# Altium PCB PCB1.PcbDoc
Units mm, origin at the board's own origin, x right, y up, seen from the top; angles counter-clockwise.
Board outline 74 x 32 mm, 2 copper layers (Top Layer, Bottom Layer); 32 components, 17 nets, 73 pads, 0 vias.
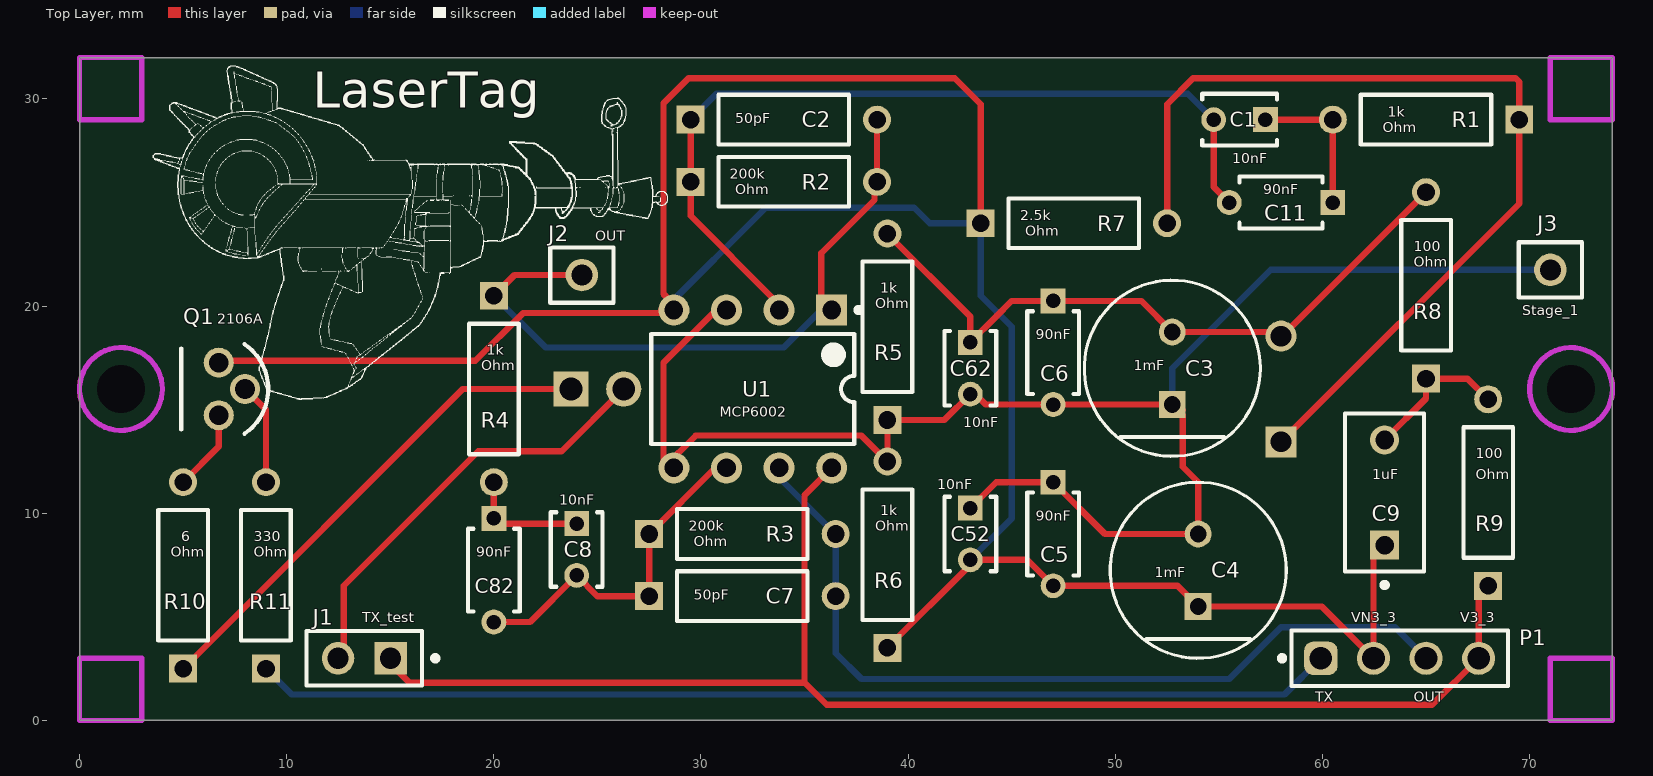
[diagram p0: Top Layer view]
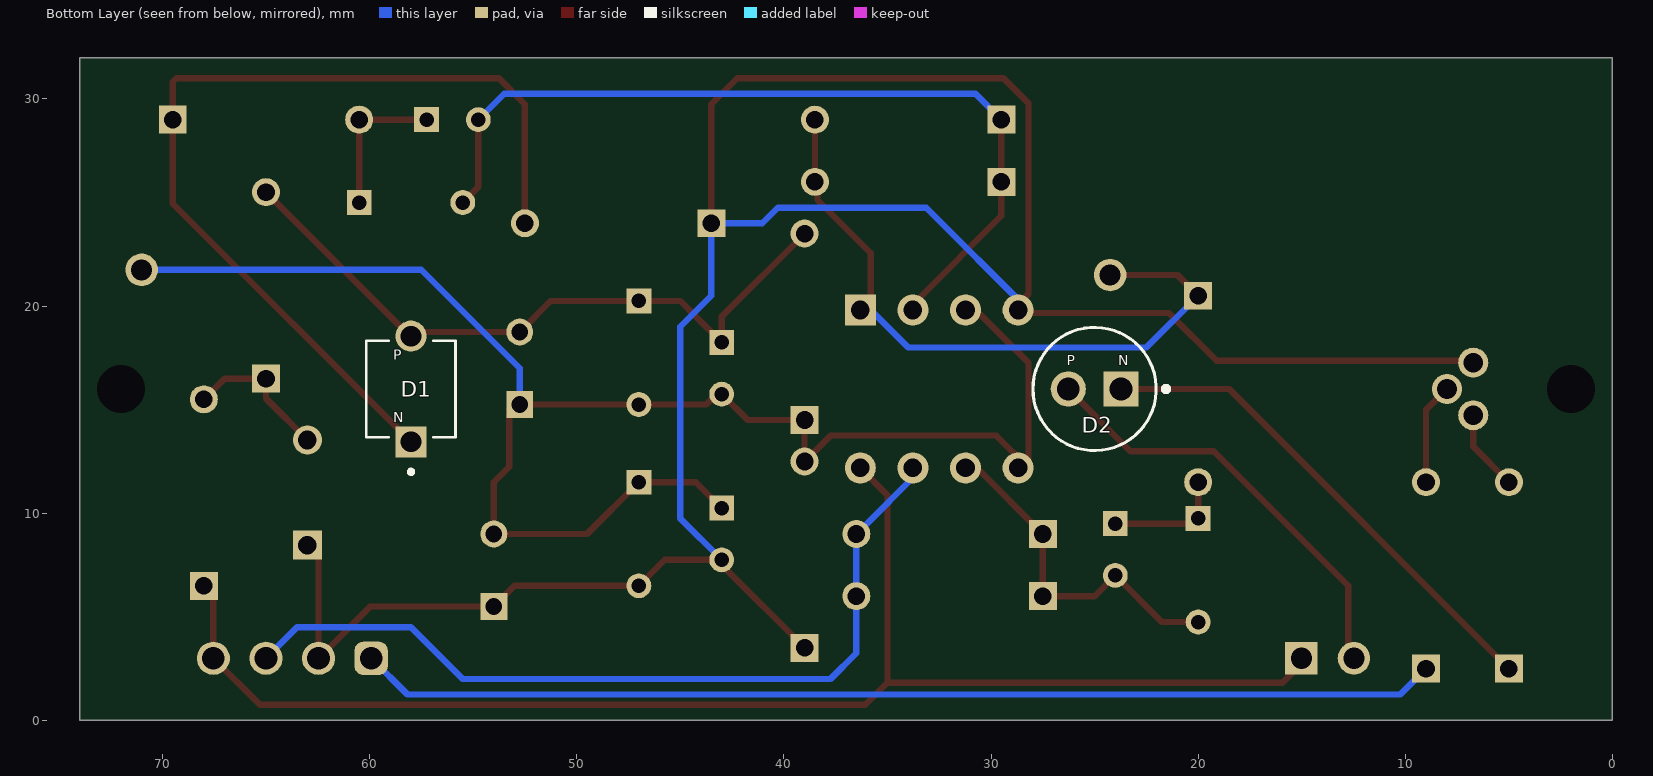
[diagram p1: Bottom Layer view, seen from below]

## Layer stack, top to bottom
Top Solder: solder mask 0.0102, Solder Resist, Dk 3.5
Top Layer: signal copper 0.0356
Dielectric 1: dielectric 0.32, FR-4, Dk 4.8
Bottom Layer: signal copper 0.0356
Bottom Solder: solder mask 0.0102, Solder Resist, Dk 3.5

## Board outline
0,0 74,0 74,32 0,32

## Design rules (kind name [scope] priority, off if disabled: settings)
AcuteAngle [All] p1: minimum=3.00000000000000E+0001 checktracksonly=FALSE
Clearance [All] p1: gap=0.305 ignorepadtopadclearanceinfootprint=TRUE except(0: Arc-Hole Track-Hole SMDPad-Hole THPad-Hole Via-Hole Fill-Hole Poly-Hole Region-Hole; 0.152: SMDPad-SMDPad SMDPad-THPad SMDPad-Via; 0.254: Arc-Text Track-Text SMDPad-Text THPad-Text Via-Via Via-Text Fill-Text Poly-Text Region-Text Text-Text; 0.381: Arc-Arc Arc-Track Arc-SMDPad Arc-THPad Arc-Via Track-Track Track-SMDPad Track-THPad Track-Via THPad-THPad THPad-Via)
ComponentClearance [All] p1: gap=0.508 collisioncheckmode=3 verticalgap=0.508 showdistances=TRUE
DiffPairsRouting [All] p1: maxlimit=1.27 minlimit=0.305 mostfreqgap=0.305 toplayer_minwidth=0.305 toplayer_maxwidth=0.66 toplayer_prefwidth=0.508 bottomlayer_minwidth=0.305 bottomlayer_maxwidth=0.66 bottomlayer_prefwidth=0.508 maxuncoupledlength=0.508
Height [All] p1: minheight=0 maxheight=25.4 prefheight=25.4
HoleSize [All] p1: absolutevalues=TRUE maxlimit=3.25 minlimit=0.3 maxpercent=80.000 minpercent=20.000
HoleToHoleClearance [All] p1: gap=0.508 allowstackedmicrovias=TRUE
LayerPairs [All] p1: enforce=FALSE
MinimumAnnularRing [All] p1: minimumring=0.203
MinimumSolderMaskSliver [All] p1: minsoldermaskwidth=0
PermittedLayers [All] p1: toplayerpermitted=TRUE bottomlayerpermitted=TRUE
PlaneConnect [All] p1: planeconnectstyle=Relief reliefexpansion=0.508 reliefentries=4 reliefconductorwidth=0.508 reliefairgap=0.254
PolygonConnect [All] p1: thpad.connectstyle=Relief thpad.reliefconductorwidth=0.508 thpad.reliefentries=4 thpad.polygonreliefangle="45 Angle" thpad.airgapwidth=0.381 smdpad.connectstyle=Relief smdpad.reliefconductorwidth=0.254 smdpad.reliefentries=4 smdpad.polygonreliefangle="90 Angle" smdpad.airgapwidth=0.254 smdpad.conductorbypadedge=TRUE smdpad.mindistance=0.381 smdpad.enablemindistance=FALSE via.connectstyle=Relief via.reliefconductorwidth=0.508 via.reliefentries=4 via.polygonreliefangle="90 Angle" via.airgapwidth=0.254
RoutingCorners [All] p1: cornerstyle=45-Degree minsetback=0.508 maxsetback=2.54
RoutingVias [All] p1: holewidth=0.8 width=1.27 viastyle="Through Hole" minholewidth=0.6 minwidth=1.108 maxholewidth=1 maxwidth=2.032
SMDEntry [All] p1: side=TRUE corner=TRUE anyangle=TRUE
SMDNeckDown [All] p1: percent=100.000
SilkToSilkClearance [All] p1: silktosilkclearance=0
SilkToSolderMaskClearance [All] p1: minsilkscreentomaskgap=0 clearancetoexposedcopper=TRUE
SolderMaskExpansion [All] p1: expansion=0 istentingtop=FALSE
UnRoutedNet [All] p1: checkbadconnections=TRUE
Width [All] p1: maxlimit=1.27 minlimit=0.305 preferedwidth=0.508
18 further rules are at their usual default settings.

## Components (designator, comment, footprint, x,y, rotation, side; value= is the part's Value field where it differs from the comment)
C1 "RCE5C1H101J0DBH03A" FP-RCE0DB-MFG 56,29 r180 top value=100pF
C2 "MFR-25FBF52-10K" RESA60-630X240 34,29 r0 top value=10kR
C3 "EEU-FK1V181" FP-RAD-TH-D_8_0_5-L_11_5-MFG 52.75,17 r90 top value=180uF
C4 "EEU-FK1V181" FP-RAD-TH-D_8_0_5-L_11_5-MFG 54,7.25 r90 top value=180uF
C5 "RDER71H104K0M1H03A" FP-RDE0M1-MFG 47,9 r270 top value=100nF
C6 "RDER71H104K0M1H03A" FP-RDE0M1-MFG 47,17.75 r270 top value=100nF
C7 "MFR-25FBF52-10K" RESA60-630X240 32,6 r0 top value=10kR
C8 "RCE5C1H101J0DBH03A" FP-RCE0DB-MFG 24,8.25 r270 top value=100pF
C9 "C333C105M5U5TA" KEMT-C333C105M5U5TA-2 63,11 r90 top value=1uF
C11 "RDER71H104K0M1H03A" FP-RDE0M1-MFG 58,25 r180 top value=100nF
C52 "RCE5C1H101J0DBH03A" FP-RCE0DB-MFG 43,9 r270 top value=100pF
C62 "RCE5C1H101J0DBH03A" FP-RCE0DB-MFG 43,17 r270 top value=100pF
C82 "RDER71H104K0M1H03A" FP-RDE0M1-MFG 20,7.25 r270 top value=100nF
D1 "BPW34S" DIO_BPW34S 58,16 r90 bottom locked
D2 "TSFF5210" FP-6_544-5258_09-4-MFG 25,16 r0 bottom locked
J1 "M20-9990246" FP-M20-9990246-MFG 13.75,3 r180 top
J2 "PBC01SAAN" FP-PBC01SAAN-MFG 24.25,21.5 r0 top
J3 "PBC01SAAN" FP-PBC01SAAN-MFG 71,21.75 r0 top
P1 "61300411121" 61300411121 63.73,3 r0 top
Q1 "LP0701N3-G" FP-N3-MFG 7,16 r180 top
R1 "MFR-25FBF52-10K" RESA60-630X240 65,29 r180 top value=10kR
R2 "MFR-25FBF52-10K" RESA60-630X240 34,26 r0 top value=10kR
R3 "MFR-25FBF52-10K" RESA60-630X240 32,9 r0 top value=10kR
R4 "MFR-25FBF52-10K" RESA60-630X240 20,16 r270 top value=10kR
R5 "MFR-25FBF52-10K" RESA60-630X240 39,19 r90 top value=10kR
R6 "MFR-25FBF52-10K" RESA60-630X240 39,8 r90 top value=10kR
R7 "MFR-25FBF52-10K" RESA60-630X240 48,24 r0 top value=10kR
R8 "MFR-25FBF52-10K" RESA60-630X240 65,21 r90 top value=10kR
R9 "MFR-25FBF52-10K" RESA60-630X240 68,11 r90 top value=10kR
R10 "MFR-25FBF52-10K" RESA60-630X240 5,7 r90 top value=10kR
R11 "MFR-25FBF52-10K" RESA60-630X240 9,7 r90 top value=10kR
U1 "MCP6002-E/P" PDIP300-P8 32.5,16 r270 top

## Footprints (in the part's own frame and the unit in brackets; to place one, negate y for a bottom-side part, rotate by r counter-clockwise, add the part's x,y. Pads: shape width x height; smd on the part's side, far side on the other; paste and mask are expansions set on the pad)
61300411121 [mm] "Pin Header, pitch 2.54 mm, THT, Vertical, single row, 4p"
  rrect50% 1.6x1.6 hole 1.1: 1(-3.81,0)
  round 1.6 hole 1.1: 2(-1.27,0) 3(1.27,0) 4(3.81,0)
  silkscreen extent -5.8,-1.35 5.23,1.35, body extent -5.08,-1.27 5.08,1.27, height 8.57
DIO_BPW34S [mm]
  round 1.5 hole 1: A(2.55,0)
  rect 1.5x1.5 hole 1: C(-2.55,0)
  silkscreen extent -4.1,-2.15 2.32,2.15
FP-6_544-5258_09-4-MFG [mm]
  rect 1.7x1.7 hole 1.1 paste-1000 mask+0: 1(-1.27,0)
  round 1.7 hole 1.1 paste-1000 mask+0: 2(1.27,0)
  silkscreen extent -3.57,-2.97 2.98,2.97, body extent -2.5,-2.9 2.89,2.9, height 9.11
FP-M20-9990246-MFG [mm]
  rect 1.57x1.57 hole 1.02 paste-1000 mask+0: 1(-1.27,0)
  round 1.57 hole 1.02 paste-1000 mask+0: 2(1.27,0)
  silkscreen extent -3.55,-1.32 2.79,1.32, body extent -2.89,-1.42 2.89,1.42, height 0.25
FP-N3-MFG [mm]
  round 1.45 hole 0.95 paste-1000 mask+0: 1(0.279,-1.27) 2(-0.991,0) 3(0.279,1.27)
  silkscreen extent -2.11,-2.16 2.09,2.16, body extent -2.2,-2.7 2.2,2.7, height 0.25
FP-PBC01SAAN-MFG [mm]
  round 1.57 hole 1.02 paste-1000 mask+0: 1(0,0)
  silkscreen extent -1.53,-1.34 1.53,1.34, body extent -1.63,-1.44 1.63,1.44, height 0.25
FP-RAD-TH-D_8_0_5-L_11_5-MFG [mm]
  rect 1.3x1.3 hole 0.8 paste-1000 mask+0: 1(-1.75,0)
  round 1.3 hole 0.8 paste-1000 mask+0: 2(1.75,0)
  silkscreen extent -4.25,-4.25 4.25,4.25, body extent -4.35,-4.35 4.35,4.35, height 0.25
FP-RCE0DB-MFG [mm]
  rect 1.2x1.2 hole 0.7 paste-1000 mask+0: 1(-1.25,0)
  round 1.2 hole 0.7 paste-1000 mask+0: 2(1.25,0)
  silkscreen extent -1.8,-1.25 1.8,1.25, body extent -1.95,-1.35 1.95,1.35, height 0.25
FP-RDE0M1-MFG [mm]
  rect 1.2x1.2 hole 0.7 paste-1000 mask+0: 1(-2.5,0)
  round 1.2 hole 0.7 paste-1000 mask+0: 2(2.5,0)
  silkscreen extent -2,-1.25 2,1.25, body extent -3.2,-1.35 3.2,1.35, height 0.25
KEMT-C333C105M5U5TA-2 [mm] "TH, 2-Leads, Body 7.62x3.81mm"
  rect 1.4x1.4 hole 0.9: 1(-2.54,0)
  round 1.4 hole 0.9: 2(2.54,0)
  silkscreen extent -4.58,-1.91 3.81,1.91, body extent -3.81,-1.91 3.81,1.91, height 9.91
PDIP300-P8 [mm] "8-Pin Plastic Dual In-Line Package (PDIP)"
  rect 1.5x1.5 hole 0.9: 1(-3.81,3.81)
  round 1.5 hole 0.9: 2(-3.81,1.27) 3(-3.81,-1.27) 4(-3.81,-3.81) 5(3.81,-3.81) 6(3.81,-1.27) 7(3.81,1.27) 8(3.81,3.81)
  silkscreen extent -3.93,-4.9 2.65,5.24, body extent -3.55,-4.9 3.55,4.9, height 4.32
RESA60-630X240 [mm] "Axial Resistor, 2-Leads, Dia 2.4mm, Body Length 6.3mm"
  rect 1.35x1.35 hole 0.85: 1(-4.5,0)
  round 1.35 hole 0.85: 2(4.5,0)
  silkscreen extent -3.15,-1.2 3.15,1.2, body extent -3.15,-1.2 3.15,1.2, height 2.4

## Part data
C1 C8 C52 C62: library part CMP-00030-00004-1, "Ceramic Capacitor, Multilayer, Ceramic, 50V, 5% +Tol, 5% -Tol, C0G, 30ppm/Cel TC, 0.0001uF, Through Hole Mount, 1410", Capacitor Type=Ceramic, Case/Package=1410, Max Operating Temperature=125°C, Min Operating Temperature=-55°C, Package Style=RadialMeter, Rated DC Voltage (URdc)=50V, Temperature Characteristics Code=C0G, Tolerance  (fill in as +-)=5%, Dielectric Material=Ceramic, Height=3.5mm, Length=3.6mm, Packaging="Ammo Pack", Pins=2, Reach SVHC Compliant=Yes, Reference Standard=AEC-Q200, RoHS Compliant=Yes, Terminal Pitch=2.5mm, Tolerance (fill in as +-)=5%, Width=2.5mm
C2 C7 R1 R2 R3 R4 R5 R6 R7 R8 R9 R10 R11: library part CMP-00030-00002-1, "Fixed Resistor, Metal Film, 0.25W, 10000ohm, 250V, 1% +/-Tol, -100,100ppm/Cel", Max Operating Temperature=155°C, Min Operating Temperature=-55°C, Package Length=6.3mm, Package Shape=Cylindrical, Package Style=AXIAL, Power=250mW, Resistor Type="FIXED RESISTOR", Temperature Coefficient=-100100ppm/°C, Tolerance=1%, Working Voltage=250V, Construction=Cylindrical, JESD-609 Code=e3, Lead Diameter=0.55mm, Lead Length=28mm, Packaging=Bulk, Pins=2, Reach SVHC Compliant=Yes, RoHS Compliant=Yes, Technology="METAL FILM", Terminal Finish=Tin
C3 C4: library part CMP-00030-00005-1, "Aluminum Electrolytic Capacitor, Polarized, Aluminum (wet), 35V, 20% +Tol, 20% -Tol, 180uF, Through Hole Mount", Capacitor Type=Aluminium, Leakage Current=63uA, Max Operating Temperature=105°C, Min Operating Temperature=-55°C, Package Style=RadialMeter, Rated DC Voltage (URdc)=35V, Ripple Current=441mA, Tolerance  (fill in as +-)=20%, Diameter=8mm, Dielectric Material=Aluminium, Length=11.5mm, Mounting Technology="Through Hole", Packaging=Bulk, Pins=2, Polarity=Polarized, Reach SVHC Compliant=Yes, Reference Standard=AEC-Q200, RoHS Compliant=Yes, Tan Delta=0.12, Terminal Pitch=3.5mm, Termination=Wire, Tolerance (fill in as +-)=20%
C5 C6 C11 C82: library part CMP-00030-00006-1, "Ceramic Capacitor, Multilayer, Ceramic, 50V, 10% +Tol, 10% -Tol, X7R, 15% TC, 0.1uF, Through Hole Mount, 1610", Capacitor Type=Ceramic, Case/Package=1610, Max Operating Temperature=125°C, Min Operating Temperature=-55°C, Package Shape=Rectangular, Package Style=RadialMeter, Rated DC Voltage (URdc)=50V, Temperature Characteristics Code=X7R, Tolerance  (fill in as +-)=10%, Dielectric Material=Ceramic, Height=3.5mm, Length=4mm, Mounting Technology="Through Hole", Multilayer=Yes, Packaging="Ammo Pack", Pins=2, Reach SVHC Compliant=Yes, RoHS Compliant=Yes, Terminal Pitch=5mm, Termination=Wire, Tolerance (fill in as +-)=10%, Width=2.5mm
C9: library part CMP-00030-00003-1, "Ceramic Capacitor, Multilayer, Ceramic, 50V, 20% +Tol, 20% -Tol, Z5U, -56/+22% TC, 1uF, Through Hole Mount", Capacitor Type=Ceramic, Case/Package=3015, Max Operating Temperature=85°C, Min Operating Temperature=10°C, Package Shape=Rectangular, Package Style=RadialMeter, Rated DC Voltage (URdc)=50V, Temperature Characteristics Code=Z5U, Tolerance  (fill in as +-)=20%, Dielectric Material=Ceramic, Height=9.91mm, JESD-609 Code=e3, Length=7.62mm, Mounting Technology="Through Hole", Multilayer=Yes, Packaging=Bulk, Pins=2, Reach SVHC Compliant=Yes, RoHS Compliant=Yes, Terminal Finish=Nickel, Terminal Pitch=5.08mm, Termination=Wire, Tolerance (fill in as +-)=20%, Width=3.81mm
D1: "Photodiode 850nm 20ns 120Â° 2-SMD, Gull Wing", Package="DIP-2 Osram", Availability=Unavailable, MF="OSRAM Opto", MP=BPW34S, Price=None, SnapEDA_Link=https://www.snapeda.com/parts/BPW34S/OSRAM%20Opto%20Semiconductors%20Inc./view-part/253768/?ref=snap
D2: library part CMP-00030-00011-1, "Infrared LED, 5mm, 1-Element, 870nm", Forward Current=100mA, Forward Voltage=1.8V, Max Operating Temperature=85°C, Min Operating Temperature=-40°C, Output Power-Nom=50mW, Reverse Voltage-Max=5V, Additional Feature="HIGH RELIABILITY", Channels=1, JESD-609 Code=e3, Mounting Technology="Through Hole", Optoelectronic Device Type="INFRARED LED", Reach SVHC Compliant=Yes, RoHS Compliant=Yes, Semiconductor Material=GaAlAs, Shape=Round, Size=5mm, Spectral Bandwidth=4E-08nm, Terminal Finish=Tin, Viewing Angle=20°
J1: library part CMP-00030-00001-1, "Board Connector, 2 Contact(s), 1 Row(s), Male, Straight, 0.1 inch Pitch, Solder Terminal, Locking, Black Insulator", Max Operating Temperature=105°C, Min Operating Temperature=-40°C, Mounting Technology=Board, RoHS Compliant=Yes
J2 J3: library part CMP-00030-00009-1, "Board Connector, 1 Contact(s), 1 Row(s), Male, Straight, 0.1 inch Pitch, Solder Terminal", Max Operating Temperature=125°C, Min Operating Temperature=-65°C, Rated Current (Signal)=3A, Body Breadth=0.1inch, Body Depth=0.1inch, Body Length=0.1inch, Connector Type="BOARD CONNECTOR", Contact Finish - Mating="AU ON NI", Contact Finish - Termination="Matte Tin (Sn) - with Nickel (Ni) barrier", Contact Gender=Male, Contact Material=Bronze, Contact Pattern=RECTANGULAR, Contact Style="SQ PIN-SKT", Insulation Material=Polybutylene, JESD-609 Code=e3, Manufacturer Series=PBC01SAAN, Mating Contact Pitch=0.1inch, Mounting Style=STRAIGHT, Mounting Technology=Board, Number Of Connectors=1, Number of Contacts=1, Number Of PCB Rows=1, Number of Rows Loaded=1, Plating Thickness=10uin, Reach SVHC Compliant=Yes, Reference Standard=UL, Reliability=COMMERCIAL, RoHS Compliant=Yes, Terminal Length=0.12inch, Terminal Pitch=2.54mm, Termination=Solder
P1: library part CMP-00030-00012-1, "Board Connector, 4 Contact(s), 1 Row(s), Male, Straight, 0.1 inch Pitch, Solder Terminal, Locking, Black Insulator, Plug", Contact Resistance=20mR, Dielectric Withstanding Voltage (AC)=500V, Insulation Color=Black, Insulation Resistance=1GR, Max Operating Temperature=125°C, Min Operating Temperature=-40°C, Rated Current (Signal)=3A, Body Breadth=0.1inch, Body Depth=0.1inch, Body Length=0.4inch, Body/Shell Style=PLUG, Connector Type="BOARD CONNECTOR", Contact Finish - Mating=GOLD, Contact Finish - Termination="Gold (Au) - with Nickel (Ni) barrier", Contact Gender=Male, Contact Material="Copper Alloy", Contact Pattern=RECTANGULAR, Contact Style="SQ PIN-SKT", Insulation Material=Polybutylene, JESD-609 Code=e4, Mating Contact Pitch=0.1inch, Mounting Option 1=LOCKING, Mounting Style=STRAIGHT, Mounting Technology=Board, Number Of Connectors=1, Number of Contacts=4, Number of Rows Loaded=1, PCB Contact Pattern=RECTANGULAR, Reach SVHC Compliant=Yes, Reference Standard=UL, Reliability=COMMERCIAL, RoHS Compliant=Yes, Terminal Length=0.118inch, Terminal Pitch=2.54mm, Termination=Solder
Q1: library part CMP-00030-00008-1, "Mosfet; P-channel Enhancement-mode; -16.5V; 1.5 OHM3 TO-92BAG"
U1: library part CMP-00030-00007-1, "Operational Amplifier, 2 Func, 4500uV Offset-Max, CMOS, PDIP8", Case/Package=DIP, Frequency Compensation=YES, Input Offset Voltage-Max=4.5mV, Max Operating Temperature=125°C, Max Supply Current=340uA, Micropower=Yes, Min Operating Temperature=-40°C, Nominal Supply Voltage=5V, Package Body Material=Plastic, Package Equivalence Code=SOLCC8,.11,20, Package Shape=Rectangular, Package Style=IN-LINEMeter, Power=No, Power Supplies=2.5V, Supply Voltage Limit-Max=7V, Temperature Grade=AUTOMOTIVE, Voltage Gain-Min=25110, Amplifier Type="OPERATIONAL AMPLIFIER", Architecture=VOLTAGE-FEEDBACK, Channels=2, Common-mode Reject Ratio-Nom=76dB, Height - Seated (Max)=5.33mm, JESD-30 Code=R-PDIP-T8, JESD-609 Code=e3, Length=9.271mm, Low-Bias=No, Low-Offset=No, Pins=8, Programmable Power=No, Qualification Status="Not Qualified", Reach SVHC Compliant=Yes, RoHS Compliant=Yes, Slew Rate=0.6V/µs, Surface Mount=No, Technology=CMOS, Terminal Finish=Tin, Terminal Form="Through Hole", Terminal Pitch=2.54mm, Terminal Position=DUAL, Unity Gain BW-Nom=1MHz, Wideband=No, Width=7.62mm

## Free pads (board coordinates)
  round 0 hole 2.3: 3(2,16) 3(72,16)

## Nets (pads, with @x,y where several pads share a name; then routed paths per layer and width w, separated by ;. In a path a pad name is that pad's centre, name@x,y a point inside that pad or via, vN(x,y) a via of type N, cw(c..) or ccw(c..) an arc to the next point about the centre after c; other vN are vias at no path point)
GND: C3.1 C4.2 C5.1 C6.2 C52.1 C62.2 J3.1 R5.1 R6.2 U1.3 U1.5 | length 79
  Top Layer w0.305: U1.3@30.73,19.81 28.19,17.27 28.19,12.19 29.75,13.75 37.75,13.75 R6.2 R5.1 41.75,14.5 C62.2 43.242,15.75 43.742,15.25 C3.1 ; C52.1 44.25,11.5 C5.1 49.5,9 C4.2 54,11.5 53.25,12.25 53.25,14.75 C3.1 ; C3.1@53.25,15 53,15.25 C3.1
  Bottom Layer w0.305: C3.1 52.75,17 57.5,21.75 J3.1
NetC1_1: C1.1 C11.1 R1.2 | length 7.2
  Top Layer w0.305: C1.1 R1.2 C11.1
NetC1_2: C1.2 C2.1 C11.2 R2.1 U1.2 | length 41.6
  Top Layer w0.305: C2.1 R2.1 29.5,24.356 33.518,20.338 33.518,20.058 U1.2@33.27,19.81 ; C1.2 54.75,25.75 C11.2
  Bottom Layer w0.305: C2.1 30.75,30.25 53.5,30.25 C1.2
NetC2_2: C2.2 J2.1 R2.2 R4.1 U1.1 | length 32.6
  Top Layer w0.305: R4.1 21,21.5 J2.1 ; U1.1@35.81,19.81 35.81,22.56 38.379,25.129 38.379,25.879 R2.2 C2.2
  Bottom Layer w0.305: R4.1 22.5,18 34,18 U1.1@35.81,19.81
NetC7_1: C7.1 C8.2 C82.2 R3.1 U1.6 | length 16.8
  Top Layer w0.305: C82.2 21.75,4.75 C8.2 25,6 C7.1 R3.1 ; R3.1@27.25,9.25 R3.1 ; U1.6@30.73,12.19 30.69,12.19 R3.1
NetC8_1: C8.1 C82.1 R4.2 | length 5.9
  Top Layer w0.305: R4.2 C82.1 20.25,9.5 C8.1
NetC9_2: C9.2 R8.1 R9.2 | length 7.2
  Top Layer w0.305: C9.2 65,15.54 R8.1 67,16.5 R9.2
NetD2_1: D2.1 R10.1 | length 24.3
  Top Layer w0.305: R10.1 18.5,16 D2.1
NetD2_2: D2.2 J1.2 | length 21
  Top Layer w0.305: J1.2@12.75,3 12.75,6.5 19.25,13 23.27,13 D2.2
NetQ1_2: Q1.2 R11.2 | length 4.9
  Top Layer w0.305: Q1.2 9,14.991 R11.2
NetQ1_3: Q1.3 R10.2 | length 3.9
  Top Layer w0.305: R10.2 6.721,13.221 Q1.3
Sig: D1.C R1.1 R7.2 | length 45.5
  Top Layer w0.305: R7.2 52.5,29.75 53.75,31 69.321,31 69.5,30.821 R1.1 69.5,24.95 D1.C
TRS: P1.1 R11.1 | length 52.2
  Bottom Layer w0.305: R11.1 9.522,1.978 10.25,1.25 58.17,1.25 P1.1
V3_3: J1.1 P1.4 R9.1 U1.8 | length 69.3
  Top Layer w0.305: J1.1@14.75,3 15.931,1.819 35,1.819 ; U1.8 35,10.88 35,1.819 ; R9.1 67.54,6.04 P1.4 65.29,0.75 36.069,0.75 35,1.819
V_OUT: C7.2 P1.3 R3.2 U1.7 | length 41
  Bottom Layer w0.305: U1.7@33.29,12.19 36.48,9 R3.2 C7.2 36.5,3.25 37.75,2 55.5,2 58,4.5 63.5,4.5 P1.3
V_POS: C3.2 C6.1 C62.1 D1.A R5.2 R8.2 | length 33.2
  Top Layer w0.305: R5.2 43,19.5 C62.1 44.25,19.5 45,20.25 C6.1 51.25,20.25 C3.2 58.25,18.75 R8.2
VN3_3: C4.1 C5.2 C9.1 C52.2 P1.2 Q1.1 R6.1 R7.1 U1.4 | length 124.2
  Top Layer w0.305: Q1.1@6.811,17.36 19.108,17.36 21.416,19.668 28.19,19.668 28.332,19.81 U1.4 ; U1.4@28.19,19.81 28.438,20.058 28.438,20.338 28.19,20.586 28.19,29.794 29.396,31 42.25,31 43.5,29.75 R7.1 ; R6.1 43,7.5 C52.2 45.75,7.75 C5.2 53,6.5 C4.1 59.96,5.5 P1.2 62.46,7.92 C9.1
  Top Layer w0.508: Q1.1 Q1.1@6.811,17.36 ; U1.4@28.19,19.81 28.438,19.81 U1.4
  Bottom Layer w0.305: U1.4@28.19,19.81 33.13,24.75 40.285,24.75 41.035,24 R7.1 43.5,20.5 45,19 45,9.75 C52.2

## Keep-outs
Top Layer:
  circle w0.254: c72,16 r2
  circle w0.254: c2,16 r2
  lines w0.254: 0,0 0,3 3,3 3,0 0,0 ; 0,29 3,29 3,32 0,32 0,29 ; 71,0 71,3 74,3 74,0 71,0 ; 71,29 74,29 74,32 71,32 71,29

## Silkscreen, mask and mechanical layers (free items; w line width, h text height)
Top Overlay:
  drawing of 3 lines, arcs and shapes, not listed
  text "LaserTag" at 11.25,29.583 h1.75
  text "1k" at 63.15,29.15 h0.5
  text "50pF" at 31.65,28.817 h0.5
  text "Ohm" at 62.9,28.4 h0.5
  text "10nF" at 55.65,26.9 h0.5
  text "200k" at 31.4,26.15 h0.5
  text "Ohm" at 31.65,25.4 h0.5
  text "90nF" at 57.15,25.4 h0.5
  text "2.5k" at 45.4,24.15 h0.5
  text "Ohm" at 45.65,23.4 h0.5
  text "OUT" at 24.9,23.15 h0.5
  text "100" at 64.4,22.65 h0.5
  text "Ohm" at 64.4,21.9 h0.5
  text "1k" at 38.65,20.65 h0.5
  text "Ohm" at 38.4,19.9 h0.5
  text "Stage_1" at 69.65,19.567 h0.5
  text "2106A" at 6.65,19.15 h0.5
  text "90nF" at 46.15,18.4 h0.5
  text "1k" at 19.65,17.65 h0.5
  text "Ohm" at 19.4,16.9 h0.5
  text "1mF" at 50.9,16.9 h0.5
  text "MCP6002" at 30.9,14.65 h0.5
  text "10nF" at 42.65,14.15 h0.5
  text "100" at 67.4,12.65 h0.5
  text "1uF" at 62.4,11.65 h0.5
  text "Ohm" at 67.4,11.65 h0.5
  text "10nF" at 41.4,11.15 h0.5
  text "10nF" at 23.15,10.4 h0.5
  text "1k" at 38.65,9.9 h0.5
  text "90nF" at 46.15,9.65 h0.5
  text "200k" at 29.4,9.15 h0.5
  text "Ohm" at 38.4,9.15 h0.5
  text "6" at 4.9,8.65 h0.5
  text "330" at 8.4,8.65 h0.5
  text "Ohm" at 29.65,8.4 h0.5
  text "Ohm" at 4.4,7.9 h0.5
  text "Ohm" at 8.4,7.9 h0.5
  text "90nF" at 19.15,7.9 h0.5
  text "1mF" at 51.9,6.9 h0.5
  text "50pF" at 29.65,5.817 h0.5
  text "TX_test" at 13.65,4.733 h0.5
  text "VN3_3" at 61.4,4.733 h0.5
  text "V3_3" at 66.65,4.733 h0.5
  text "TX" at 59.65,0.9 h0.5
  text "OUT" at 64.4,0.9 h0.5
Bottom Overlay:
  text "P" at 58.85,17.4 h0.5
  text "N" at 23.85,17.15 h0.5
  text "P" at 26.35,17.15 h0.5
  text "N" at 58.85,14.4 h0.5